# Altium PCB LED_ring.PcbDoc
Units mm, origin at the board's own origin, x right, y up, seen from the top; angles counter-clockwise.
Board outline 53 x 53 mm, 4 copper layers (Component Side, Ground Plane, Power Plane, Solder Side), stack 0.575 mm thick; 46 components, 33 nets, 148 pads, 53 vias.
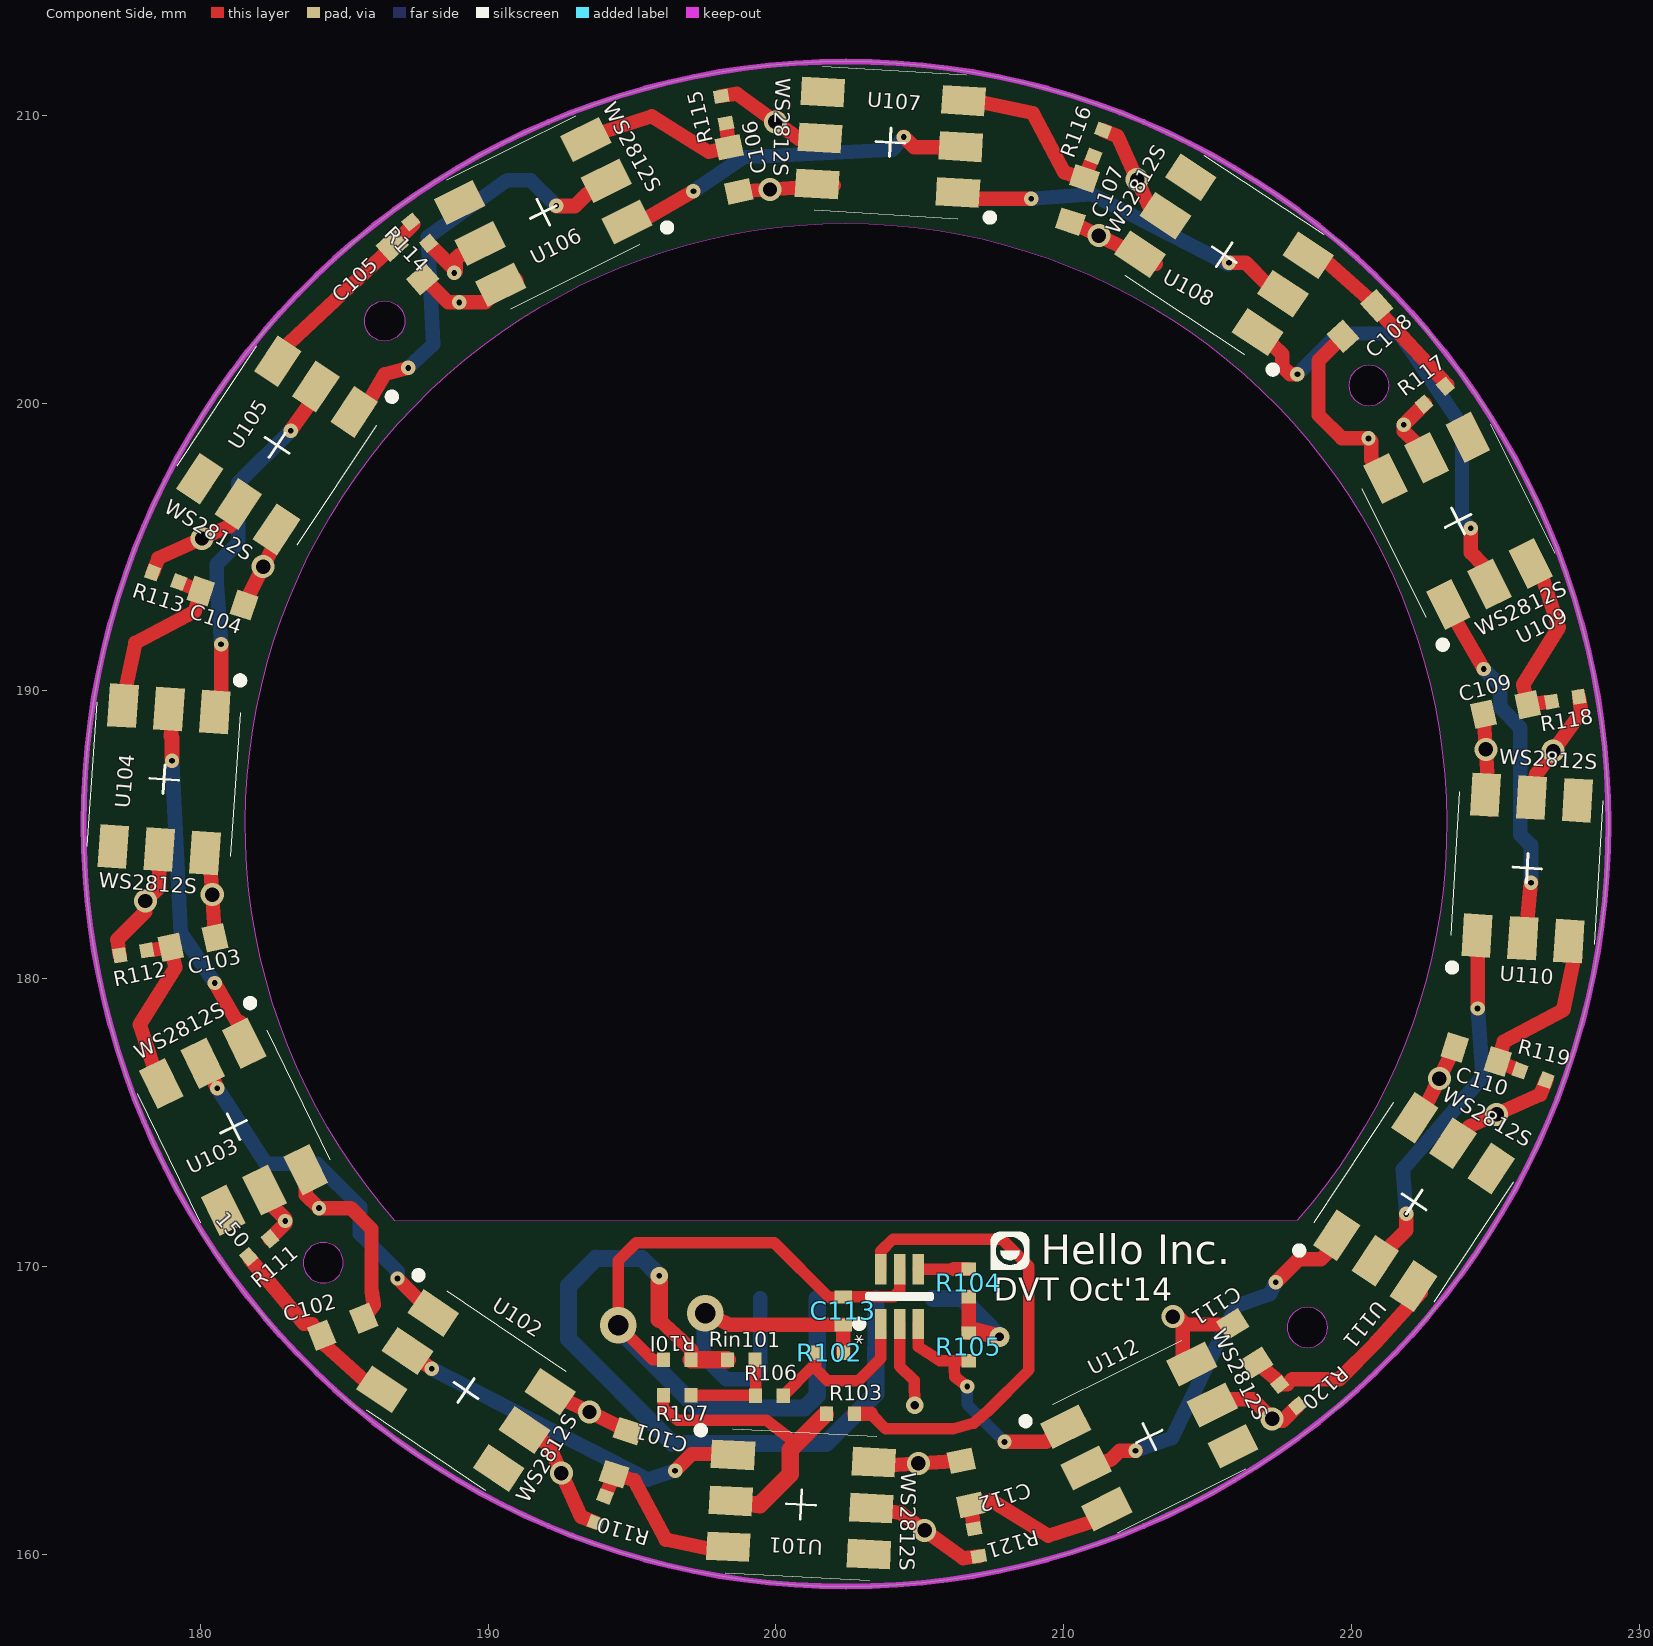
[diagram p0: Component Side view]
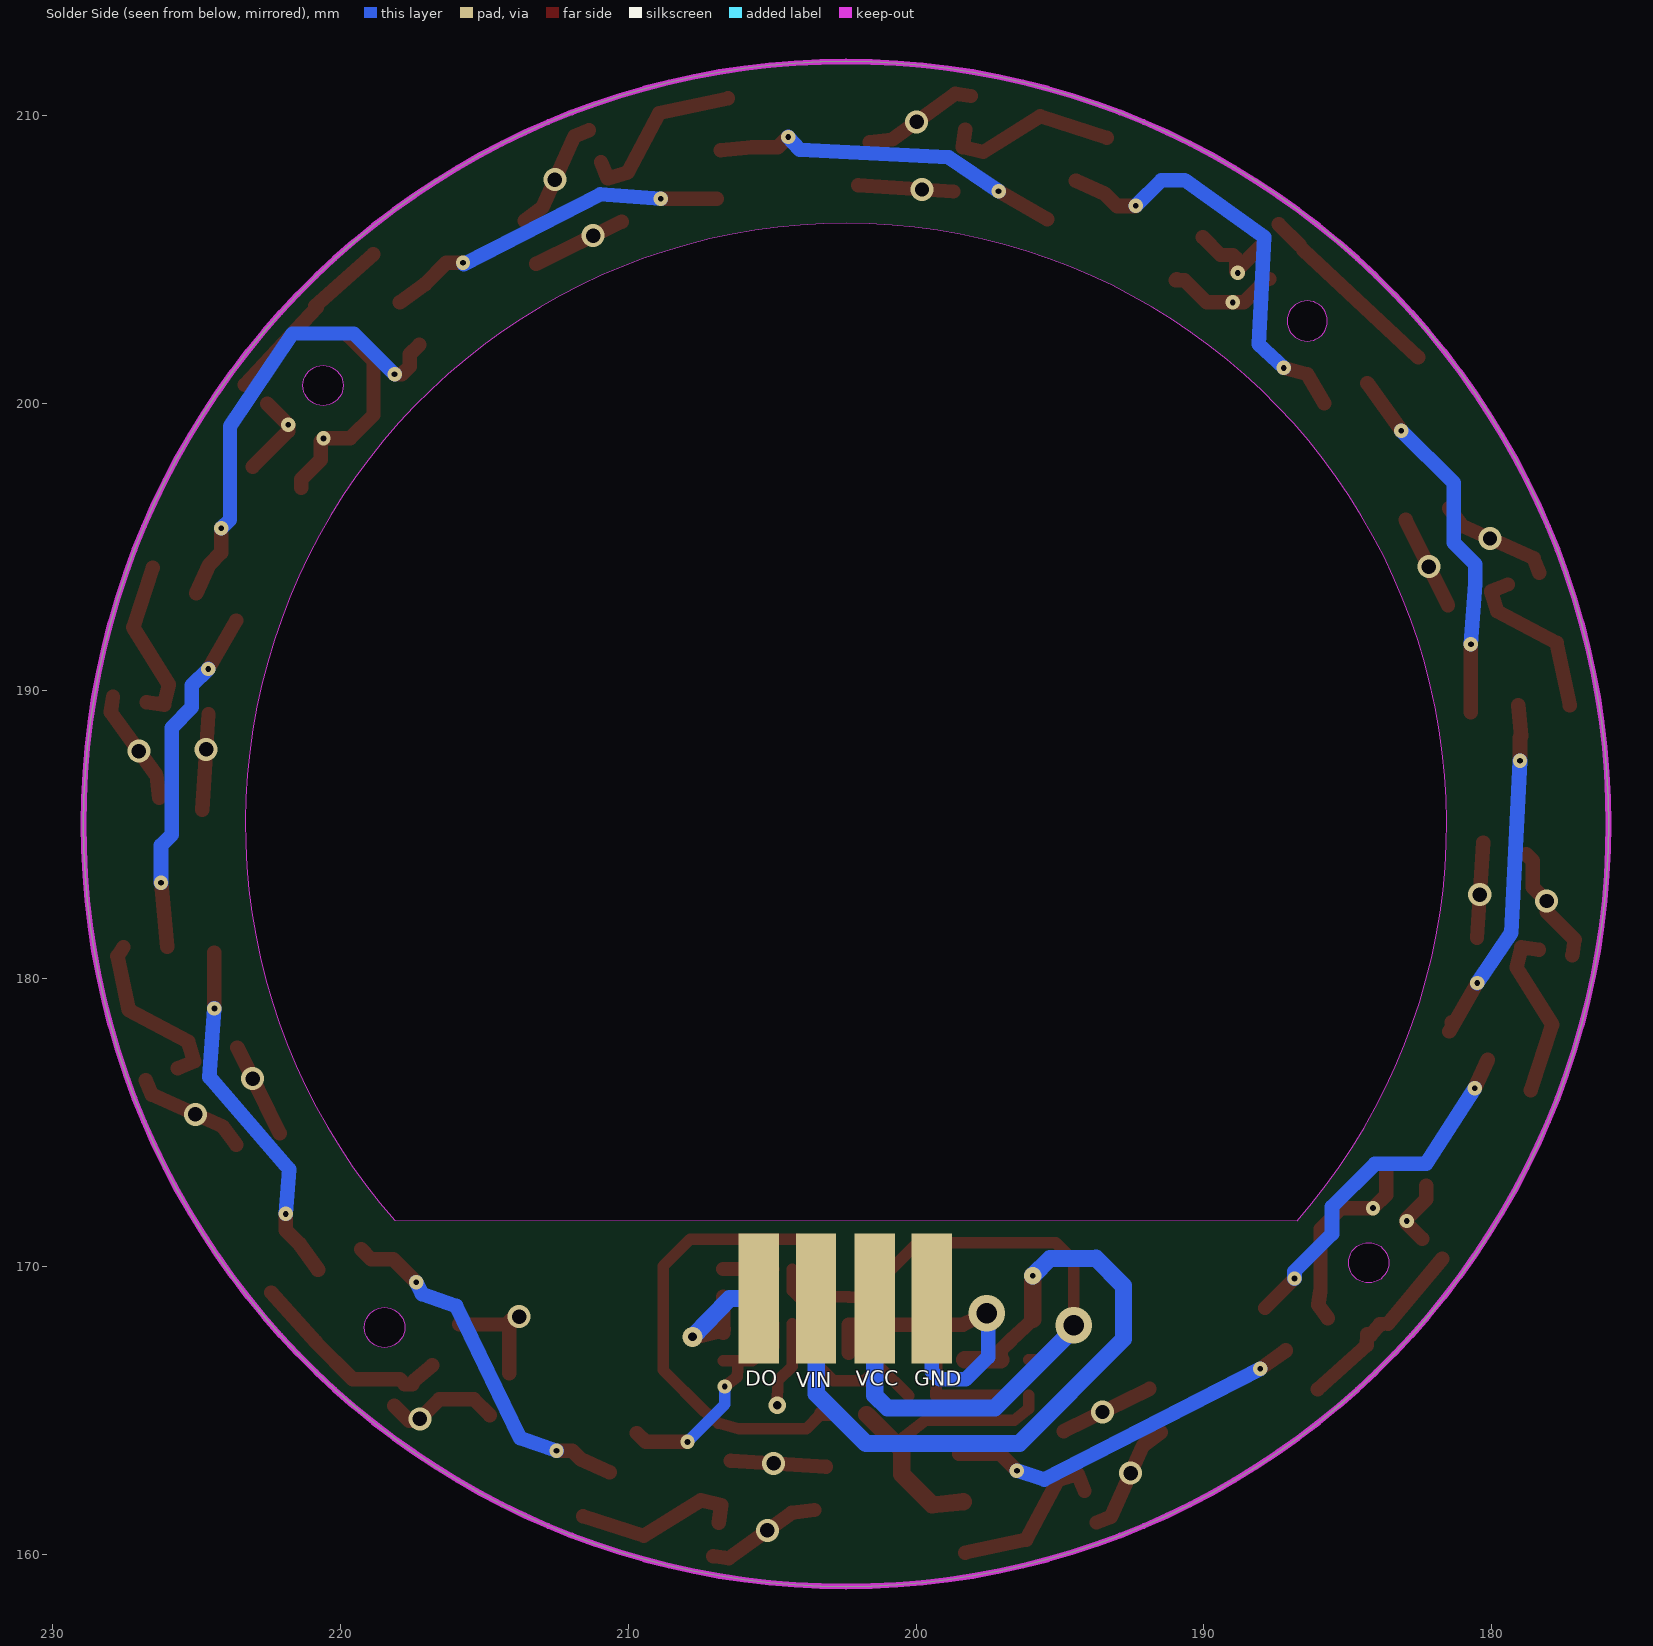
[diagram p1: Solder Side view, seen from below]
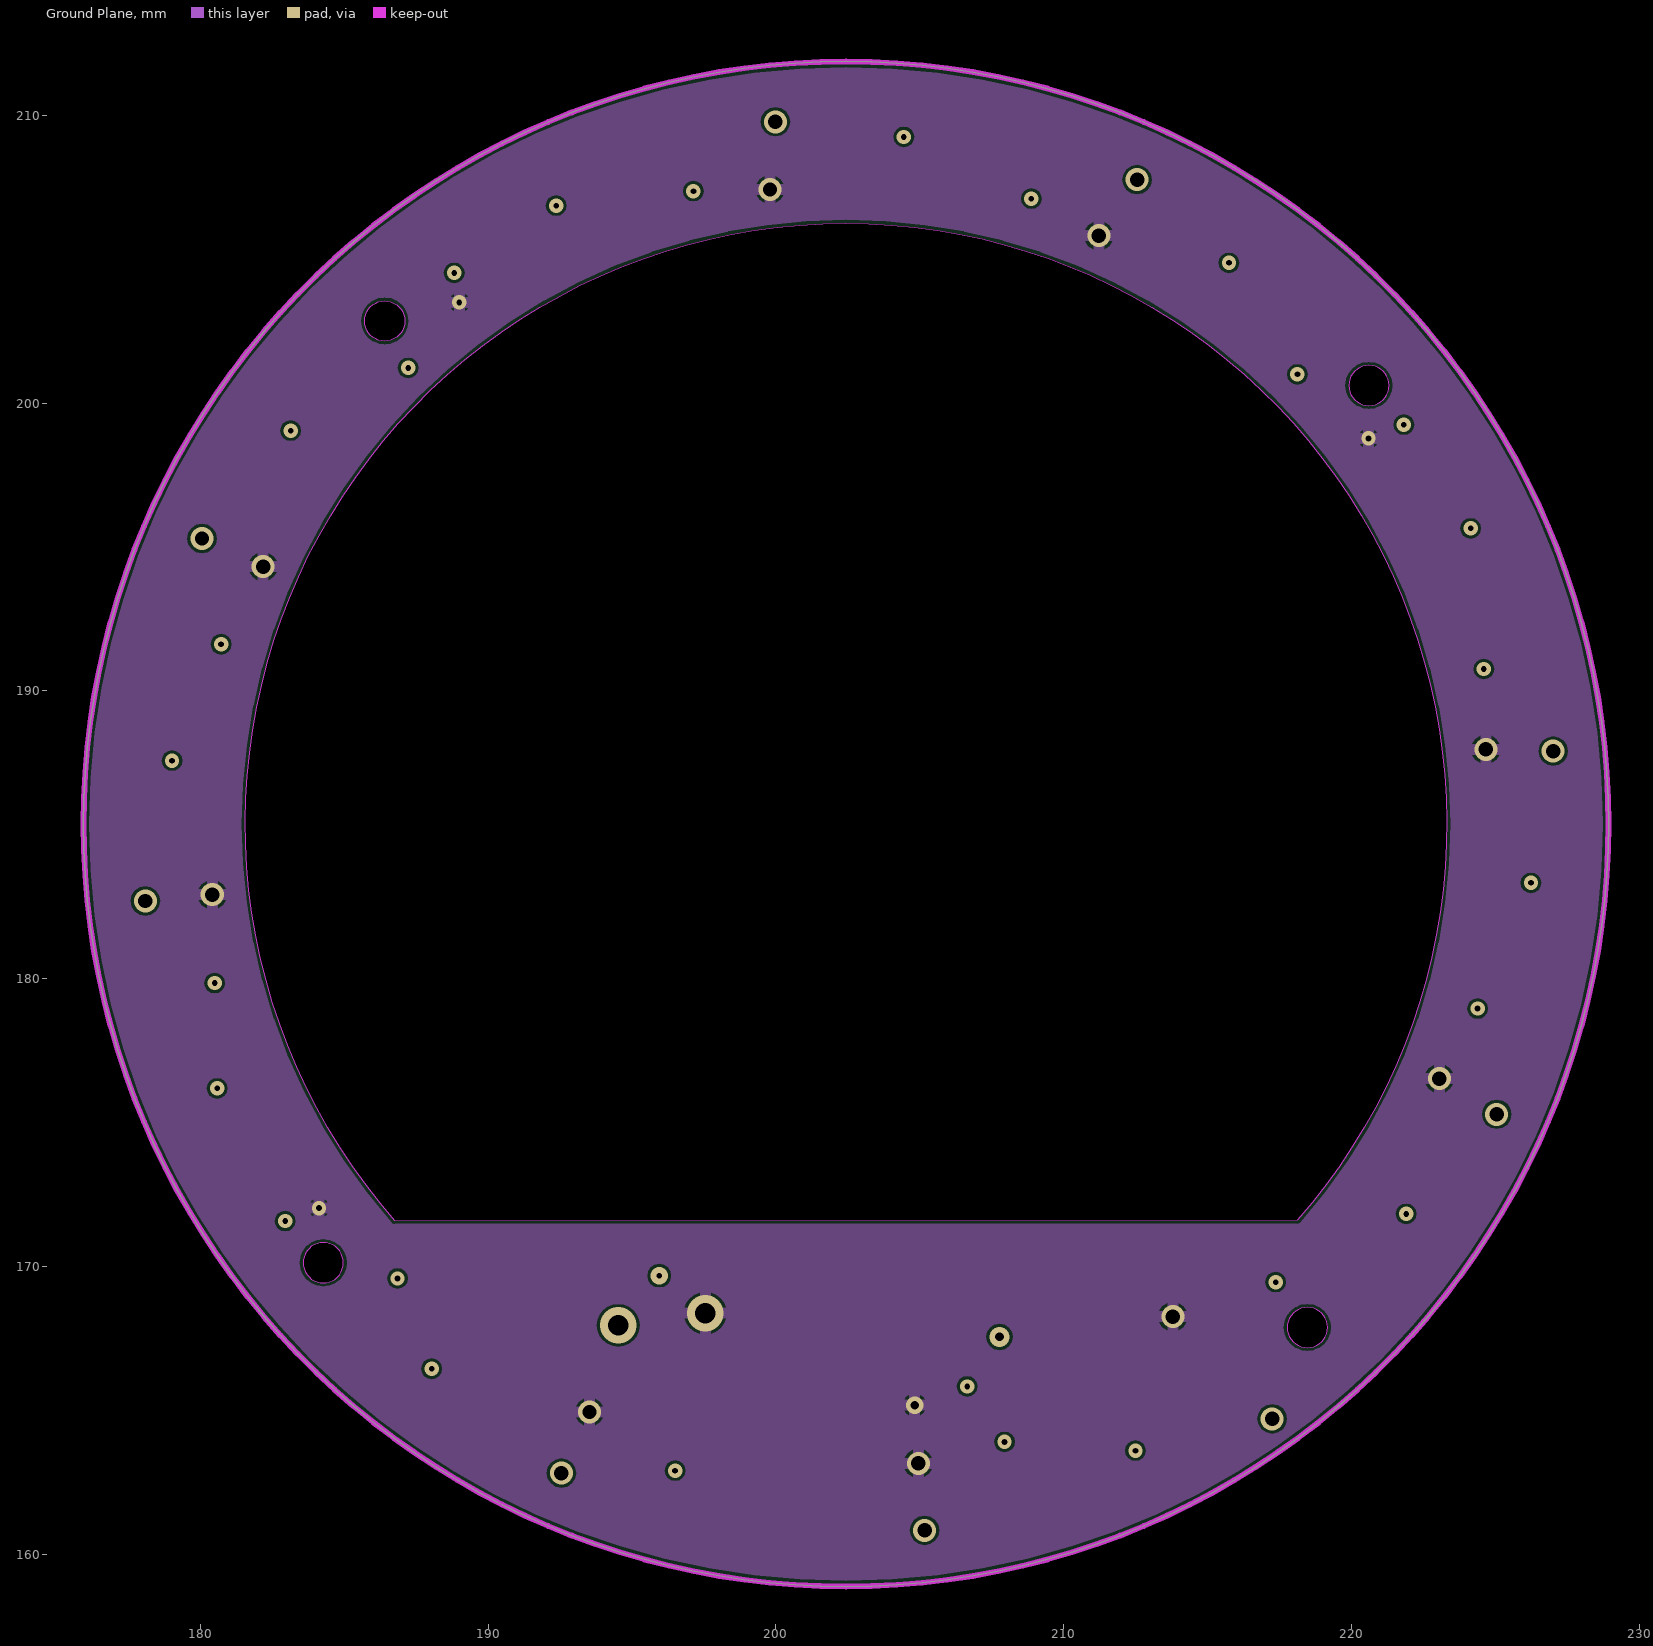
[diagram p2: Ground Plane]
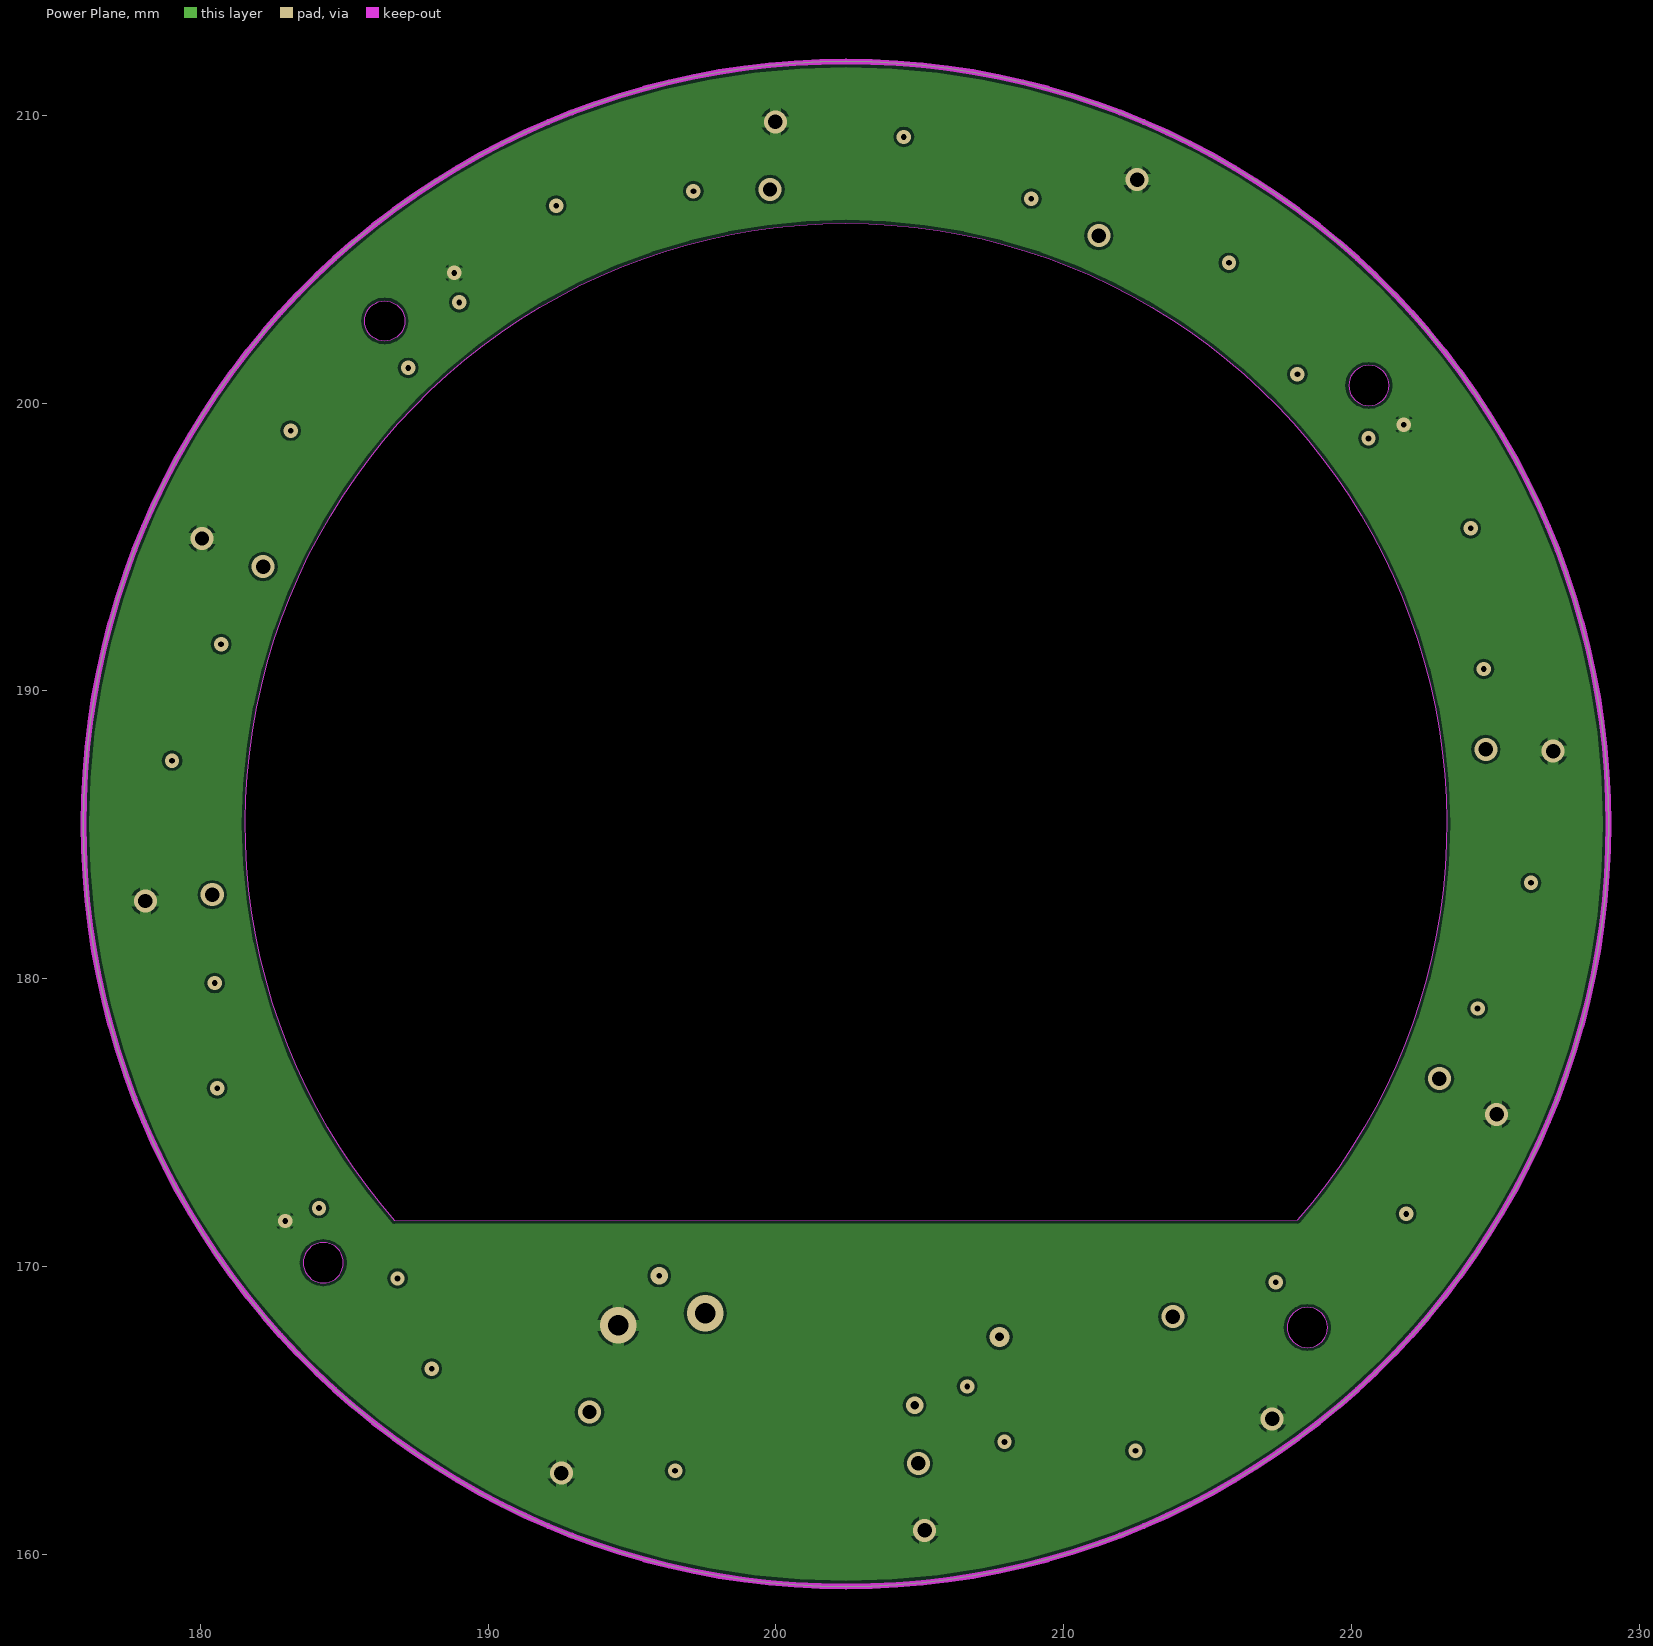
[diagram p3: Power Plane]

## Layer stack, top to bottom
Top Solder: solder mask 0.0102, Solder Resist, Dk 3.5
Component Side: signal copper 0.0356
Dielectric 1: core 0.1524, FR-4, Dk 4.8
Ground Plane: signal copper 0.036
Dielectric 2: prepreg 0.127, FR-4, Dk 4.8
Power Plane: signal copper 0.036
Dielectric 3: core 0.1524, FR-4, Dk 4.8
Solder Side: signal copper 0.0356
Bottom Solder: solder mask 0.0102, Solder Resist, Dk 3.5

## Board outline
175.94,185.373 ccw(c202.44,185.373) 202.44,158.873 ccw(c202.44,185.373) 228.94,185.373 ccw(c202.44,185.373) 202.44,211.873 ccw(c202.44,185.373)
cut-out: 186.765,171.587 cw(c202.44,185.373) 218.129,171.603
cut-out: 186.409,202.155 cw(c186.409,202.855) 185.709,202.855 cw(c186.409,202.855) 186.409,203.555 cw(c186.409,202.855) 187.109,202.855 cw(c186.409,202.855)
cut-out: 219.913,200.615 ccw(c220.613,200.615) 220.613,199.915 ccw(c220.613,200.615) 221.313,200.615 ccw(c220.613,200.615) 220.613,201.315 ccw(c220.613,200.615)
cut-out: 217.775,167.875 ccw(c218.475,167.875) 218.475,167.175 ccw(c218.475,167.875) 219.175,167.875 ccw(c218.475,167.875) 218.475,168.575 ccw(c218.475,167.875)
cut-out: 183.575,170.125 ccw(c184.275,170.125) 184.275,169.425 ccw(c184.275,170.125) 184.975,170.125 ccw(c184.275,170.125) 184.275,170.825 ccw(c184.275,170.125)

## Design rules (kind name [scope] priority, off if disabled: settings)
AssemblyTestpoint [(IsPad And (OnTopLayer Or OnBottomLayer))] p1: testpointundercomponent=FALSE minsize=0.3 maxsize=2.54 preferedsize=0.6 minholesize=0 maxholesize=1.016 preferedholesize=0 testpointgrid=0.025 usegrid=TRUE gridtolerance=0 allowsidetop=TRUE allowsidebottom=TRUE minspacing=1 compbodyclearance=1 boardedgeclearance=1
Clearance Clearance_1 [All] p1: gap=0.1
Clearance "Polygon to board edge" [All vs OnLayer('Keep-Out Layer')] p2: gap=0.5
DiffPairsRouting [All] p1: maxlimit=0.254 minlimit=0.15 mostfreqgap=0.254 toplayer_prefgap=0.15 toplayer_minwidth=0.15 toplayer_maxwidth=0.381 toplayer_prefwidth=0.15 midlayer1_minwidth=0.15 midlayer1_maxwidth=0.381 midlayer1_prefwidth=0.381 midlayer2_minwidth=0.15 midlayer2_maxwidth=0.381 midlayer2_prefwidth=0.381 bottomlayer_prefgap=0.15 bottomlayer_minwidth=0.15 bottomlayer_maxwidth=0.381 bottomlayer_prefwidth=0.15 maxuncoupledlength=12.7
FabricationTestpoint [(IsPad And (OnTopLayer Or OnBottomLayer))] p1: side=3 testpointundercomponent=TRUE minsize=0.3 maxsize=2.54 preferedsize=0.6 minholesize=0 maxholesize=1.016 preferedholesize=0 testpointgrid=0.025 allowsidetop=TRUE allowsidebottom=TRUE usegrid=TRUE gridtolerance=0 minspacing=1 compbodyclearance=1 boardedgeclearance=1
FanoutControl Fanout_Default [All] p5: bgadir=Out bgaviamode=Centered fanoutstyle=Staggered fanoutdirection=Alternating viagrid=0.025 // Fanout_Default (Default Rule)
HoleSize [All] p1 off: absolutevalues=TRUE maxlimit=5 minlimit=0.35 maxpercent=80.000 minpercent=20.000
MinimumSolderMaskSliver [All] p1 off: minsoldermaskwidth=0.2
PasteMaskExpansion [All] p1: expansion=-0.05
PolygonConnect "Polygon Connect Net Tie" [(InComponentClass('Net Tie'))] p1: connectstyle=Direct reliefconductorwidth=0.254 reliefentries=4 polygonreliefangle="90 Angle" airgapwidth=0.254
PolygonConnect [All] p2: connectstyle=Relief reliefconductorwidth=0.4 reliefentries=4 polygonreliefangle="90 Angle" airgapwidth=0.1
RoutingCorners [All] p1: cornerstyle=45-Degree minsetback=1 maxsetback=5
RoutingVias "Power VIas" [InNetClass('Power')] p1: holewidth=0.2 width=0.4 viastyle="Through Hole" minholewidth=0.2 minwidth=0.4 maxholewidth=1 maxwidth=1
RoutingVias [All] p2: holewidth=0.2 width=0.4 viastyle="Through Hole" minholewidth=0.2 minwidth=0.4 maxholewidth=1 maxwidth=1
ShortCircuit "ShortCircuit between AGND and GND" [(InNet('GND')) vs (InNet('AGND'))] p1: allowed=TRUE
ShortCircuit [All] p2: allowed=FALSE
SilkToSolderMaskClearance [IsPad] p1 off: minsilkscreentomaskgap=0 clearancetoexposedcopper=TRUE
SolderMaskExpansion [All] p1: expansion=0.07
Width "Power width" [InNetClass('Power')] p1: maxlimit=2 minlimit=0.2 preferedwidth=1
Width LED [InNetClass('LED')] p2: maxlimit=0.15 minlimit=0.15 preferedwidth=0.15
Width TP [InNetClass('TP')] p3: maxlimit=0.15 minlimit=0.15 preferedwidth=0.15
Width [All] p4: maxlimit=2 minlimit=0.15 preferedwidth=0.15
19 further rules are at their usual default settings.

## Classes and differential pairs
differential pair class COMM_LINES: COMM

## Components (designator, comment, footprint, x,y, rotation, side; value= is the part's Value field where it differs from the comment)
* "74HCT2G04" SOT363-6M 204.3,168.95 r90 top
C101 "0.1u" CAP0603_SENSE_DVT 194.625,163.525 r252 top
C102 "0.1u" CAP0603_SENSE_DVT 184.95,167.9 r202 top (schematic designator C101)
C103 "0.1u" CAP0603_SENSE_DVT 179.742,181.256 r192 top (schematic designator C101)
C104 "0.1u" CAP0603_SENSE_DVT 180.77,193.22 r162 top (schematic designator C101)
C105 "0.1u" CAP0603_SENSE_DVT 187.2,204.9 r132 top (schematic designator C101)
C106 "0.1u" CAP0603_SENSE_DVT 198.545,208.125 r102 top (schematic designator C101)
C107 "0.1u" CAP0603_SENSE_DVT 210.481,207.057 r72 top (schematic designator C101)
C108 "0.1u" CAP0603_SENSE_DVT 220.3,202.85 r42 top (schematic designator C101)
C109 "0.1u" CAP0603_SENSE_DVT 225.366,189.35 r12 top (schematic designator C101)
C110 "0.1u" CAP0603_SENSE_DVT 224.344,177.361 r342 top (schematic designator C101)
C111 "0.1u" CAP0603_SENSE_DVT 216.3,167.325 r302 top (schematic designator C101)
C112 "0.1u" CAP0603_SENSE_DVT 206.612,162.478 r282 top (schematic designator C101)
C113 "0.1u" CAP0402_SENSE_DVT 202.35,168.45 r270 top
R10l "1.5k" RES0402_SENSE_DVT 196.575,166.75 r180 top
R102 "1.5k" RES0402_SENSE_DVT 201.875,167 r180 top
R103 "100" RES0402_SENSE_DVT 202.25,164.875 r180 top
R104 "100" RES0402_SENSE_DVT 206.7,169.425 r270 top
R105 "DNP" RES0402_SENSE_DVT 206.7,167.2 r90 top
R106 "0" RES0402_SENSE_DVT 199.775,165.5 r0 top
R107 "DNP" RES0402_SENSE_DVT 196.575,165.525 r180 top
R110 "150" RES0402_SENSE_DVT 193.9,161.55 r250 top
R111 "150" RES0402_SENSE_DVT 182.05,170.65 r40 top (schematic designator R110)
R112 "150" RES0402_SENSE_DVT 177.669,180.897 r190 top (schematic designator R110)
R113 "150" RES0402_SENSE_DVT 178.795,193.945 r160 top (schematic designator R110)
R114 "150" RES0402_SENSE_DVT 187.625,205.925 r310 top (schematic designator R110)
R115 "150" RES0402_SENSE_DVT 198.186,210.197 r100 top (schematic designator R110)
R116 "150" RES0402_SENSE_DVT 211.206,209.032 r70 top (schematic designator R110)
R117 "150" RES0402_SENSE_DVT 222.9,200.275 r220 top (schematic designator R110)
R118 "150" RES0402_SENSE_DVT 227.439,189.71 r10 top (schematic designator R110)
R119 "150" RES0402_SENSE_DVT 226.319,176.636 r340 top (schematic designator R110)
R120 "150" RES0402_SENSE_DVT 217.825,165.525 r310 top (schematic designator R110)
R121 "150" RES0402_SENSE_DVT 206.972,160.405 r280 top (schematic designator R110)
Rin101 "475" RES0402_SENSE_DVT 198.8,166.75 r180 top
U101 "WS2812S" 6PIN_WS2812 200.875,161.725 r177 top
U102 "WS2812S" 6PIN_WS2812 189.235,165.686 r146 top
U103 "WS2812S" 6PIN_WS2812 181.158,174.854 r116 top
U104 "WS2812S" 6PIN_WS2812 178.74,186.928 r86 top
U105 "WS2812S" 6PIN_WS2812 182.668,198.535 r56.5 top
U106 "WS2812S" 6PIN_WS2812 191.919,206.638 r26.5 top
U107 "WS2812S" 6PIN_WS2812 203.98,209.065 r356.5 top
U108 "WS2812S" 6PIN_WS2812 215.584,205.158 r326.5 top
U109 "WS2812S" 6PIN_WS2812 223.712,195.905 r296.5 top
U110 "WS2812S" 6PIN_WS2812 226.115,183.845 r266.5 top
U111 "WS2812S" 6PIN_WS2812 222.183,172.241 r236.5 top
U112 "WS2812S" 6PIN_WS2812 212.981,164.087 r206.5 top

## Footprints (in the part's own frame and the unit in brackets; to place one, negate y for a bottom-side part, rotate by r counter-clockwise, add the part's x,y. Pads: shape width x height; smd on the part's side, far side on the other; paste and mask are expansions set on the pad)
6PIN_WS2812 [mm] "6-pin 5.4 x 5.4 x 1.5mm"
  rect 1.5x1 smd: 1(2.45,-1.6) 2(2.45,0) 3(2.45,1.6) 4(-2.45,1.6) 5(-2.45,0) 6(-2.45,-1.6)
  silkscreen extent -2.5,-2.52 3.74,2.5, body extent -2.51,-2.51 2.5,2.52, height 0.8
CAP0402_SENSE_DVT [mil] "Chip Capacitor, 2-Leads"
  rect 18x24 smd: 1(-19,0) 2(19,0)
  body extent -21,-11 21,11, height 22
CAP0603_SENSE_DVT [mil] "Chip Capacitor, 2-Leads"
  rect 30x35 smd: 1(-31,0) 2(31,0)
  body extent -31,-16 32,16, height 31
RES0402_SENSE_DVT [mil] "Chip resistor 0402"
  rect 18x20 smd: 1(-19,0) 2(19,0)
  body extent -24,-8 24,8, height 20
SOT363-6M [mm]
  rect 1.05x0.4 smd: 1(-0.95,0.65) 2(-0.95,0) 3(-0.95,-0.65) 4(0.95,-0.65) 5(0.95,0) 6(0.95,0.65)
  silkscreen extent -1.07,-1.1 0.05,1.52, body extent -0.7,-1.1 0.7,1.1

## Part data
*: "Dual inverter The 74HC2G04; 74HCT2G04 is a high-speed Si-gate CMOS device."
C101 C102 C103 C104 C105 C106 C107 C108 C109 C110 C111 C112: library part C_10u_10_6.3_X5R_0603, "Chip capacitor"
C113: library part C_0.1u_10_50_X7R_0402, "Chip capacitor"
R10l R102: library part R_1.5k_5_0.1_0402, "Chip Resistor"
R103 R104 R105: library part R_100_1_0.1_0402, "Chip Resistor"
R106 R107: library part R_0_jumper_0.1_0402, "Chip Resistor"
R110 R111 R112 R113 R114 R115 R116 R117 R118 R119 R120 R121: library part R_150_1_0.1_0402, "Chip Resistor"
Rin101: library part R_475_1_0.1_0402, "Chip Resistor"
U101 U102 U103 U104 U105 U106 U107 U108 U109 U110 U111 U112: library part WS2812, "WS2812 Intelligent control LED integrated light source"

## Free pads (board coordinates)
  rect 1.4x4.524 smd far side: AGND(199.456,168.882) DO(205.468,168.883) VCC(201.438,168.882) VI(203.482,168.883)

## Via types
v1: diameter 0.5, hole 0.2, Component Side to Solder Side, tented both sides, 30 vias
v2: diameter 0.8, hole 0.5, Component Side to Solder Side, tented both sides, 18 vias
v3: diameter 1.27, hole 0.711, Component Side to Solder Side, tented both sides, 2 vias
v4: diameter 0.6, hole 0.3, Component Side to Solder Side, tented both sides, 1 vias
v5: diameter 0.6, hole 0.2, Component Side to Solder Side, tented both sides, 1 vias
v6: diameter 0.7, hole 0.3, Component Side to Solder Side, tented both sides, 1 vias

## Nets (pads, with @x,y where several pads share a name; then routed paths per layer and width w, separated by ;. In a path a pad name is that pad's centre, name@x,y a point inside that pad or via, vN(x,y) a via of type N, cw(c..) or ccw(c..) an arc to the next point about the centre after c; other vN are vias at no path point)
AGND: *.2 C101.1 C102.1 C103.1 C104.1 C105.1 C106.1 C107.1 C108.1 C109.1 C110.1 C111.1 C112.1 C113.2 pad.AGND R102.1 U101.6 U102.6 U103.6 U104.6 U105.6 U106.6 U107.6 U108.6 U109.6 U110.6 U111.6 U112.6 | length 63.8
  Component Side w0.4: *.2 204.3,166.525 204.809,166.035 v4(204.825,165.175)
  Component Side w0.5: U104.6@180.297,184.732 C103.1 ; C104.1 U105.6@182.989,195.952 ; U103.6 183.67,172.48 v1(184.125,172.025) 185.225,172.025 185.95,171.3 185.95,169.125 185.955,169.132 186.028,168.658 C102.1@185.692,168.2 ; C105.1 187.807,204.315 188.622,203.5 v1(189,203.5) 189.9,203.5 190.675,204.275 U106.6@190.975,204.275 ; U106.6@190.921,204.295 U106.6@190.941,204.315 ; U102.6@191.893,165.744 C101.1 ; v3(197.55,168.375) 198.375,167.975 201.785,167.967 C113.2 R102.1@202.35,167 ; C106.1 U107.6@202.021,207.569 ; U101.6@203.137,163.033 C112.1 ; C107.1 U108.6@213.213,204.838 ; v2(213.8,168.25) 213.975,168.25 214.149,168.075 U112.6@214.149,166.281 ; 214.245,167.979 C111.1 ; C108.1 218.861,201.469 218.861,199.589 219.675,198.775 v1(220.6,198.775) 220.7,198.675 220.7,198.029 221.375,197.354 U109.6@221.375,197.054 ; U111.6@222.125,174.629 C110.1 ; C109.1 U110.6@224.811,185.875
  Solder Side w0.508: v3(197.55,168.375) 197.5,168.325 197.5,166.85 198.275,166.075 199.173,166.075 199.456,166.358 pad.AGND
  other v2: 204.954,163.151 193.525,164.937 223.062,176.525 180.415,182.915 224.675,187.966 182.182,194.32 211.225,205.82 199.799,207.425
DI: R103.2 R107.2 U101.2 | length 10.7
  Component Side w0.4: R107.2 196.092,165.058 196.6,164.65 199.675,164.65 200.746,163.817
  Component Side w0.6: U101.2@198.365,161.817 199.451,161.71 ; 199.446,161.718 200.5,162.772 200.5,163.625 R103.2@201.725,164.85
DO: pad.DO R104.2 R105.2 | length 5.2
  Component Side w0.5: R105.2 R104.2
  Component Side w0.6: R105.2@206.735,167.818 v6(207.775,167.55)
  Solder Side w0.6: pad.DO 206.485,168.883 v6(207.775,167.55)
IC_OUT: *.3 R105.1 U112.1 | length 8.1
  Component Side w0.4: *.3 204.95,167.208 205.7,166.725 206.185,166.717 ; v1(206.65,165.825) 206.218,166.165 206.185,166.717 ; R105.1 206.185,166.717
  Component Side w0.5: v1(207.95,163.9) 209.398,163.9 U112.1@209.709,164.21
  Solder Side w0.4: v1(206.65,165.825) 206.65,165.2 v1(207.95,163.9)
Net*_1: *.1 R102.2 R106.2 | length 5.8
  Component Side w0.4: R106.2 201.291,166.534 201.8,166.025 202.875,166.025 203.65,166.8 *.1@203.65,167.725 ; 201.392,166.483 R102.2
Net*_4: *.4 R104.1 | length 1.8
  Component Side w0.4: *.4@204.95,169.895 206.185,169.908
  Component Side w0.5: 206.185,169.908 R104.1
Net*_6: *.6 R103.1 | length 17
  Component Side w0.4: 203.3,164.875 203.825,164.35 206.15,164.35 206.875,164.55 207.35,164.95 208.8,166.4 208.8,170 207.85,170.95 204.075,170.95 203.65,170.525 *.6
  Component Side w0.5: R103.1 203.3,164.875
NetC101_2: C101.2 R110.1 U101.3 | length 5.9
  Component Side w0.5: R110.1@194.15,162.2 194.383,162.776 195.078,162.563 196.175,160.5 U101.3@198.301,160.048
NetC102_2: C102.2 R111.1 U102.3 | length 6.4
  Component Side w0.5: R111.1@181.719,170.264 183.602,168.012 183.885,167.987 C102.2@184.208,167.6 ; C102.2@184.324,167.647 184.344,167.259 U102.3@186.048,165.726
NetC103_2: C103.2 R112.1 U103.3 | length 6.1
  Component Side w0.5: R112.1@178.357,181.005 C103.2 179.136,180.383 177.897,178.401 U103.3@178.639,176.12
NetC104_2: C104.2 R113.1 U104.3 | length 5.9
  Component Side w0.5: U104.3@177.282,189.491 177.745,191.67 179.808,192.767 180.021,193.463 R113.1@179.445,193.695
NetC105_2: C105.2 R114.1 U105.3 | length 6.5
  Component Side w0.5: U105.3@182.557,201.599 C105.2@186.558,205.331 ; C105.2 R114.1@187.406,206.219
NetC106_2: C106.2 R115.1 U106.3 | length 6.1
  Component Side w0.5: U106.3@193.38,209.218 195.691,209.969 197.672,208.731 C106.2 R115.1@198.294,209.509
NetC107_2: C107.2 R116.1 U107.3 | length 6.1
  Component Side w0.5: U107.3@206.54,210.59 208.931,210.082 210.028,208.019 C107.2 R116.1@210.956,208.382
NetC108_2: C108.2 R117.1 U108.3 | length 6.4
  Component Side w0.5: U108.3@218.867,205.169 C108.2 ; C108.2@220.831,203.324 R117.1@223.336,200.638
NetC109_2: C109.2 R118.1 U109.3 | length 5.9
  Component Side w0.5: U109.3@226.537,194.277 227.211,192.205 225.972,190.224 C109.2 R118.1@226.751,189.601
NetC110_2: C110.2 R119.1 U110.3 | length 6
  Component Side w0.5: R119.1@225.669,176.886 225.093,177.118 225.306,177.814 227.369,178.911 227.764,180.771 U110.3@227.55,181.1
NetC111_2: C111.2 R120.1 U111.3 | length 7.1
  Component Side w0.5: C111.2@216.817,166.557 R120.1@217.449,166.027 ; R120.1 217.77,165.895 217.95,166.075 219.579,166.075 220.878,167.373 220.867,167.374 U111.3@222.413,169.091
NetC112_2: C112.2 R121.1 U112.3 | length 5.9
  Component Side w0.5: R121.1@206.864,161.093 C112.2 207.486,161.871 209.467,160.633 U112.3@211.581,161.32
NetR106_1: R106.1 R107.1 Rin101.1 | length 3.5
  Component Side w0.4: R107.1 R106.1@199.292,165.525 ; Rin101.1 199.283,166.283 R106.1@199.314,165.501
NetU101_1: U101.1 U102.2 | length 12.8
  Component Side w0.5: v1(196.5,162.9) 197.077,163.477 U101.1@198.512,163.477
  Component Side w0.508: U102.2@187.152,167.077 v1(188.039,166.441)
  Solder Side w0.508: v1(188.039,166.441) 195.552,162.594 v1(196.5,162.9)
NetU102_1: U102.1 U103.2 | length 12.6
  Component Side w0.5: v1(186.854,169.579) U102.1@187.879,168.554
  Component Side w0.508: U103.2@180.135,177.182 v1(180.586,176.188)
  Solder Side w0.508: v1(180.586,176.188) 182.279,173.569 184.055,173.569 185.55,172.074 185.55,171.125 186.854,169.821 v1(186.854,169.579)
NetU103_1: U103.1 U104.2 | length 12.1
  Component Side w0.5: v1(180.501,179.847) U103.1@181.474,178.16
  Component Side w0.508: v1(179.017,187.575) 179.017,188.375 178.975,188.418 U104.2@179.081,189.504 ; U103.1@181.367,178.351 U103.1@181.379,178.486
  Solder Side w0.508: v1(179.017,187.575) 179.319,181.589 v1(180.501,179.847)
NetU104_1: U104.1 U105.2 | length 12.9
  Component Side w0.5: U104.1@180.722,189.261 v1(180.722,191.62)
  Component Side w0.508: v1(183.14,199.043) U105.2@184.322,200.693
  Solder Side w0.508: v1(180.722,191.62) 180.57,193.72 180.57,194.395 181.325,195.15 181.325,197.228 v1(183.14,199.043)
NetU105_1: U105.1 U106.2 | length 14.8
  Component Side w0.5: U105.1@185.818,199.99 186.405,201.005 v1(187.225,201.225)
  Component Side w0.508: v1(192.367,206.861) 192.378,206.85 193.019,206.85 193.452,207.283 U106.2@194.446,207.734
  Solder Side w0.5: v1(187.225,201.225) 188.1,202.05 187.9,205.775 190.675,207.75 191.478,207.75 v1(192.367,206.861)
NetU106_1: U106.1 U107.2 | length 12.3
  Component Side w0.5: U106.1@195.449,206.392 v1(197.136,207.366)
  Component Side w0.508: v1(204.45,209.25) 204.808,208.892 205.707,208.892 U107.2@206.793,208.785
  Solder Side w0.508: v1(197.136,207.366) 198.878,208.548 204.051,208.808 v1(204.45,209.25)
NetU107_1: U107.1 U108.2 | length 12.1
  Component Side w0.5: U107.1@206.933,207.105 v1(208.881,207.105)
  Component Side w0.508: v1(215.75,204.875) 216.332,204.875 217.066,204.141 U108.2@217.954,203.505
  Solder Side w0.508: v1(208.881,207.105) 210.981,207.257 v1@215.726,204.827
NetU108_1: U108.1 U109.2 | length 15.7
  Component Side w0.5: U108.1@217.277,202.023 217.6,201.7 217.6,201.275 217.875,201 v1(218.129,201)
  Component Side w0.508: v1(224.15,195.65) 224.15,194.81 224.57,194.39 U109.2@225.021,193.396
  Solder Side w0.5: v1(218.129,201) 219.548,202.42 221.675,202.42 223.85,199.2 223.85,195.95 v1(224.15,195.65)
NetU109_1: U109.1 U110.2 | length 12.3
  Component Side w0.5: U109.1@223.634,192.447 v1(224.607,190.76)
  Component Side w0.508: U110.2@226.027,181.103 v1(226.245,183.33)
  Solder Side w0.508: v1(224.607,190.76) 225.175,190.192 225.175,189.425 225.875,188.725 225.875,185 226.245,184.63 v1(226.245,183.33)
NetU110_1: U110.1 U111.2 | length 12.5
  Component Side w0.5: v1(224.392,178.961) U110.1@224.392,180.908
  Component Side w0.508: U111.2@220.792,169.888 221.428,170.775 221.907,171.255 v1(221.907,171.824)
  Solder Side w0.508: v1(221.907,171.824) 221.794,173.378 224.564,176.58 v1(224.392,178.961)
NetU111_1: U111.1 U112.2 | length 12.6
  Component Side w0.5: v1(217.375,169.45) 218.175,170.25 218.945,170.25 U111.1@219.287,170.592
  Component Side w0.508: U112.2@210.66,162.848 211.654,163.299 211.948,163.592 v1(212.5,163.592)
  Solder Side w0.508: v1(212.5,163.592) 213.766,164.032 215.993,168.627 217.175,169.037 v1(217.375,169.45)
VCC: *.5 C113.1 pad.VCC R10l.2 R110.2 R111.2 R112.2 R113.2 R114.2 R115.2 R116.2 R117.2 R118.2 R119.2 R120.2 R121.2 U101.5 U102.5 U103.5 U104.5 U105.5 U106.5 U107.5 U108.5 U109.5 U110.5 U111.5 U112.5 | length 73
  Component Side w0.4: R10l.2 195.725,166.75 v3(194.525,167.95) 194.525,170.2 195.15,170.825 199.942,170.825 201.835,168.933 C113.1 ; C113.1@202.35,168.95 204.1,168.95 204.3,169.15 *.5
  Component Side w0.5: R112.2 177.118,181.351 178.09,182.322 v2(178.09,182.698) 178.569,183.178 178.569,184.097 U104.5@178.796,184.324 ; R113.2 178.545,194.614 181.017,195.726 U105.5@181.484,196.35 ; U103.5@182.277,172.796 182.277,172.331 182.95,171.659 182.95,171.491 R111.2 ; R114.2@188.04,205.435 v1@188.888,204.588 ; v1(188.825,204.525) 188.884,204.584 188.884,205.034 189,205.15 189.425,205.15 U106.5@190.046,205.771 ; U102.5@191.495,164.239 192.12,163.772 193.231,161.3 R110.2 ; R115.2 198.64,210.748 200.839,209.163 U107.5@201.613,209.071 ; U101.5@203.545,161.531 204.319,161.439 206.518,159.854 R121.2 ; R116.2 211.875,209.282 212.986,206.81 U108.5@213.611,206.343 ; U112.5@214.826,164.831 215.37,165.375 216.575,165.375 217.316,164.634 217.614,164.634 R120.2 ; R117.2@222.549,199.974 v1(221.825,199.25) 221.825,199.029 U109.5@223.058,197.795 ; U111.5@223.63,174.231 224.097,174.855 226.569,175.967 R119.2 ; U110.5@226.312,186.283 226.405,187.057 227.99,189.256 R118.2
  Solder Side w0.6: v3@194.25,168.1 197.275,165.075 201,165.075 201.438,165.513 pad.VCC
  other v1: 182.95,171.575
  other v2: 205.17,160.825 192.55,162.815 217.25,164.7 225.054,175.286 227.019,187.908 180.06,195.295 212.556,207.767 199.987,209.777
VIN: pad.VI R10l.1 Rin101.2 | length 26.5
  Component Side w0.5: 195.95,168.15 196.7,167.45 197.058,167.092 R10l.1
  Component Side w0.6: 195.95,168.15 v5(195.95,169.675) ; R10l.1 Rin101.2
  Solder Side w0.6: v5(195.95,169.675) 195.352,170.275 193.753,170.279 192.8,169.329 192.796,167.478 196.409,163.85 201.741,163.84 203.476,165.568 pad.VI
pads on no net: U101.4 U102.4 U103.4 U104.4 U105.4 U106.4 U107.4 U108.4 U109.4 U110.4 U111.4 U112.4

## Polygon pours and split planes (outlines as drawn)
AGND on Ground Plane "Power Plane-No Net" (solid, pour order 2): 175.94,185.373 ccw(c202.44,185.373) 202.44,158.873 ccw(c202.44,185.373) 228.94,185.373 ccw(c202.44,185.373) 202.44,211.873 ccw(c202.44,185.373)
no net on Keep-Out Layer "Power Plane-No Net" (none): 175.94,185.373 ccw(c202.44,185.373) 202.44,158.873 ccw(c202.44,185.373) 228.94,185.373 ccw(c202.44,185.373) 202.44,211.873 ccw(c202.44,185.373)
VCC on Power Plane "Power Plane-No Net" (solid, pour order 5): 175.94,185.373 ccw(c202.44,185.373) 202.44,158.873 ccw(c202.44,185.373) 228.94,185.373 ccw(c202.44,185.373) 202.44,211.873 ccw(c202.44,185.373)

## Keep-outs
Drill Drawing:
  circle w0.013: c202.44,185.373 r26.5
  circle w0.03: c184.275,170.125 r0.7
  circle w0.03: c218.475,167.875 r0.7
  circle w0.03: c220.613,200.615 r0.7
  circle w0.03: c186.409,202.855 r0.7
  lines w0.03: 217.43,171.587 217.835,171.587 218.638,171.587

## Other copper
Ground Plane:
  pour cut-out: 186.36,202.162 cw(c186.421,202.859) 185.724,202.92 cw(c186.421,202.859) 186.482,203.557 cw(c186.421,202.859) 187.118,202.798 cw(c186.421,202.859)
  pour cut-out: 218.414,167.171 cw(c218.475,167.869) 217.778,167.93 cw(c218.475,167.869) 218.536,168.566 cw(c218.475,167.869) 219.172,167.808 cw(c218.475,167.869)
Multi-Layer:
  pour cut-out: 186.765,171.587 cw(c202.44,185.373) 218.129,171.603
  pour cut-out: 186.409,202.155 cw(c186.409,202.855) 185.709,202.855 cw(c186.409,202.855) 186.409,203.555 cw(c186.409,202.855) 187.109,202.855 cw(c186.409,202.855)
  pour cut-out: 217.775,167.875 ccw(c218.475,167.875) 218.475,167.175 ccw(c218.475,167.875) 219.175,167.875 ccw(c218.475,167.875) 218.475,168.575 ccw(c218.475,167.875)
  pour cut-out: 183.575,170.125 ccw(c184.275,170.125) 184.275,169.425 ccw(c184.275,170.125) 184.975,170.125 ccw(c184.275,170.125) 184.275,170.825 ccw(c184.275,170.125)

## Silkscreen, mask and mechanical layers (free items; w line width, h text height)
Top Overlay:
  region: 208.473,170.541 207.808,170.541 ccw(c208.141,170.541) 208.141,170.208 ccw(c208.141,170.541) 208.473,170.541
  region: 207.475,169.875 207.475,170.874 cw(c207.808,170.874) 207.808,171.206 208.474,171.206 cw(c208.474,170.874) 208.806,170.874 208.806,170.208 cw(c208.474,170.208) 208.474,169.875 207.475,169.875 208.141,170.044 cw(c208.141,170.541) 207.644,170.541 cw(c208.141,170.541) 208.141,171.037 cw(c208.141,170.541) 208.637,170.541 cw(c208.141,170.541) 208.141,170.044
  text "Hello Inc." at 209.2,170.075 h1.02
  text "DVT Oct'14" at 207.575,168.8 h0.8
Bottom Overlay:
  text "GND" at 200.072,165.85 h0.52
  text "VCC" at 202.097,165.85 h0.52
  text "DO" at 205.95,165.85 h0.52
  text "VIN" at 204.175,165.8 h0.52
Drill Drawing:
  drawing of 681 lines, arcs and shapes, not listed
  text "Fab notes-" at 180.1,252.7 h1.52
  text "1. 4 layer PCB process with total  board thickness: 0.5952489 mm" at 179.9,249.4 h1.52
  text "2. 4 non-plated through holes (Cut-out) are noted as *. The diameter is 1.4mm" at 179.9,246.3 h1.52
  text "Assemble notes-" at 179.8,243.3 h1.52
  text "1. LED IC Pin #1 is noted as the triangular edge" at 179.9,239.925 h1.52
  text "2. IMPORTANT! Please follow the temperature reflow process as specified by World-Semi Documentation" at 180.025,236.85 h1.52
  text "https://www.dropbox.com/s/wnyal9r8ml1h7r3/WS2812S%28B%29%20Using%20Instructions.pdf?dl=0" at 180.225,233.625 h1.52
  text "Contact Ben Peng for more detail- ben@sayhello.com" at 180.425,230.2 h1.52
  text "Layer" at 237.412,225.983 h1.52
  text "Name" at 247.824,225.983 h1.52
  text "Material" at 271.693,225.983 h1.52
  text "Thickness" at 293.532,225.983 h1.52
  text "Constant" at 310.037,225.983 h1.52
  text "Board Layer Stack" at 324.512,225.983 h1.52
  text "1" at 237.412,222.935 h1.52
  text "Top Paste" at 247.824,222.935 h1.52
  text "2" at 237.412,219.887 h1.52
  text "Top Overlay" at 247.824,219.887 h1.52
  text "3" at 237.412,216.839 h1.52
  text "Top Solder" at 247.824,216.839 h1.52
  text "Solder Resist" at 271.693,216.839 h1.52
  text "0.40mil" at 293.532,216.839 h1.52
  text "3.5" at 310.037,216.839 h1.52
  text "4" at 237.412,213.791 h1.52
  text "Component Side" at 247.824,213.791 h1.52
  text "Copper" at 271.693,213.791 h1.52
  text "1.40mil" at 293.532,213.791 h1.52
  text "5" at 237.412,210.743 h1.52
  text "Dielectric 1" at 247.824,210.743 h1.52
  text "FR-4" at 271.693,210.743 h1.52
  text "6.00mil" at 293.532,210.743 h1.52
  text "4.8" at 310.037,210.743 h1.52
  text "6" at 237.412,207.695 h1.52
  text "Ground Plane" at 247.824,207.695 h1.52
  text "Copper" at 271.693,207.695 h1.52
  text "1.42mil" at 293.532,207.695 h1.52
  text "7" at 237.412,204.647 h1.52
  text "Dielectric 2" at 247.824,204.647 h1.52
  text "FR-4" at 271.693,204.647 h1.52
  text "5.00mil" at 293.532,204.647 h1.52
  text "4.8" at 310.037,204.647 h1.52
  text "*" at 185.925,202.225 h1.52
  text "8" at 237.412,201.599 h1.52
  text "Power Plane" at 247.824,201.599 h1.52
  text "Copper" at 271.693,201.599 h1.52
  text "1.42mil" at 293.532,201.599 h1.52
  text "*" at 220.15,199.825 h1.52
  text "9" at 237.412,198.551 h1.52
  text "Dielectric 3" at 247.824,198.551 h1.52
  text "FR-4" at 271.693,198.551 h1.52
  text "6.00mil" at 293.532,198.551 h1.52
  text "4.8" at 310.037,198.551 h1.52
  text "10" at 237.412,195.503 h1.52
  text "Solder Side" at 247.824,195.503 h1.52
  text "Copper" at 271.693,195.503 h1.52
  text "1.40mil" at 293.532,195.503 h1.52
  text "11" at 237.412,192.455 h1.52
  text "Bottom Solder" at 247.824,192.455 h1.52
  text "Solder Resist" at 271.693,192.455 h1.52
  text "0.40mil" at 293.532,192.455 h1.52
  text "3.5" at 310.037,192.455 h1.52
  text "12" at 237.412,189.407 h1.52
  text "Bottom Overlay" at 247.824,189.407 h1.52
  text "13" at 237.412,186.359 h1.52
  text "Bottom Paste" at 247.824,186.359 h1.52
  text "Symbol" at 243.375,179.325 h1.83
  text "Hit Count" at 256.224,179.325 h1.83
  text "Finished Hole Size" at 273.949,179.325 h1.83
  text "Hole Type" at 308.127,179.325 h1.83
  text "Plated" at 326.766,179.325 h1.83
  text "31" at 256.224,175.515 h1.52
  text "0.200mm (7.87mil)" at 273.949,175.515 h1.52
  text "Round" at 308.127,175.515 h1.52
  text "PTH" at 326.766,175.515 h1.52
  text "2" at 256.224,171.705 h1.52
  text "0.300mm (11.81mil)" at 273.949,171.705 h1.52
  text "Round" at 308.127,171.705 h1.52
  text "PTH" at 326.766,171.705 h1.52
  text "*" at 183.8,169.325 h1.52
  text "18" at 256.224,167.895 h1.52
  text "0.500mm (19.69mil)" at 273.949,167.895 h1.52
  text "Round" at 308.127,167.895 h1.52
  text "PTH" at 326.766,167.895 h1.52
  text "*" at 217.975,167.125 h1.52
  text "2" at 256.224,164.085 h1.52
  text "0.711mm (28.00mil)" at 273.949,164.085 h1.52
  text "Round" at 308.127,164.085 h1.52
  text "PTH" at 326.766,164.085 h1.52
  text "53 Total" at 256.224,160.275 h1.52